# Altium PCB PCB1.PcbDoc
Units mil, origin at the board's own origin, x right, y up, seen from the top; angles counter-clockwise.
Board outline 710 x 845 mil, 2 copper layers (Top Layer, Bottom Layer); 15 components, 12 nets, 64 pads, 18 vias.
Unrouted connection lines stored in the file: 1.
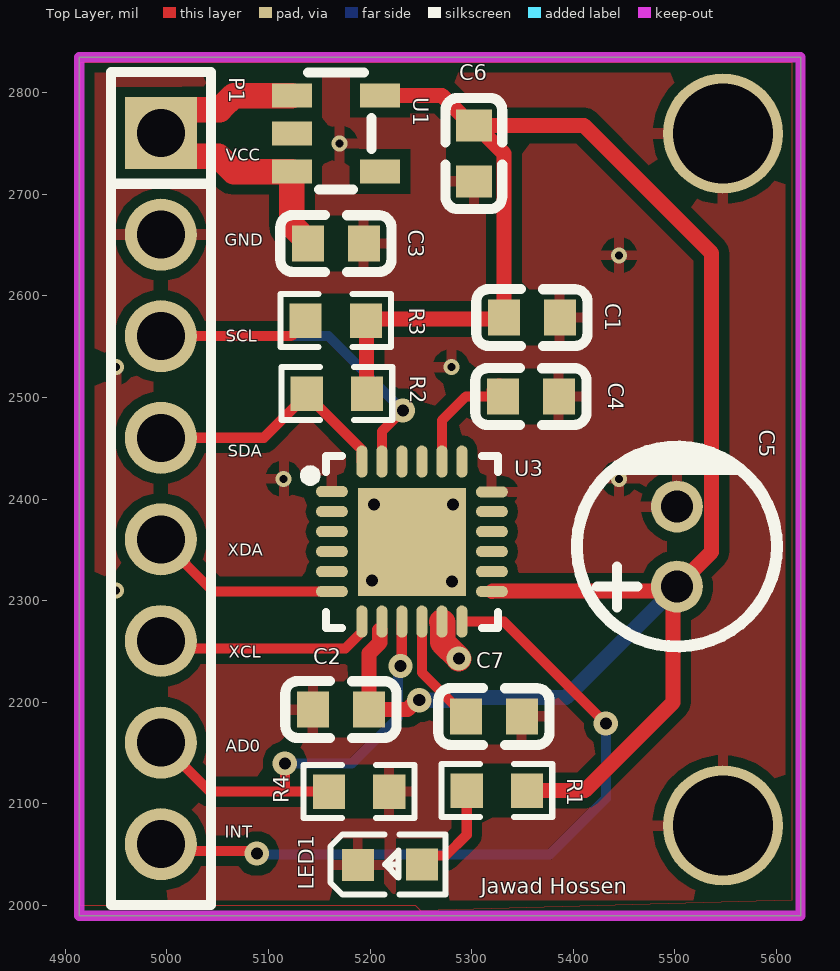
[diagram p0: Top Layer view]
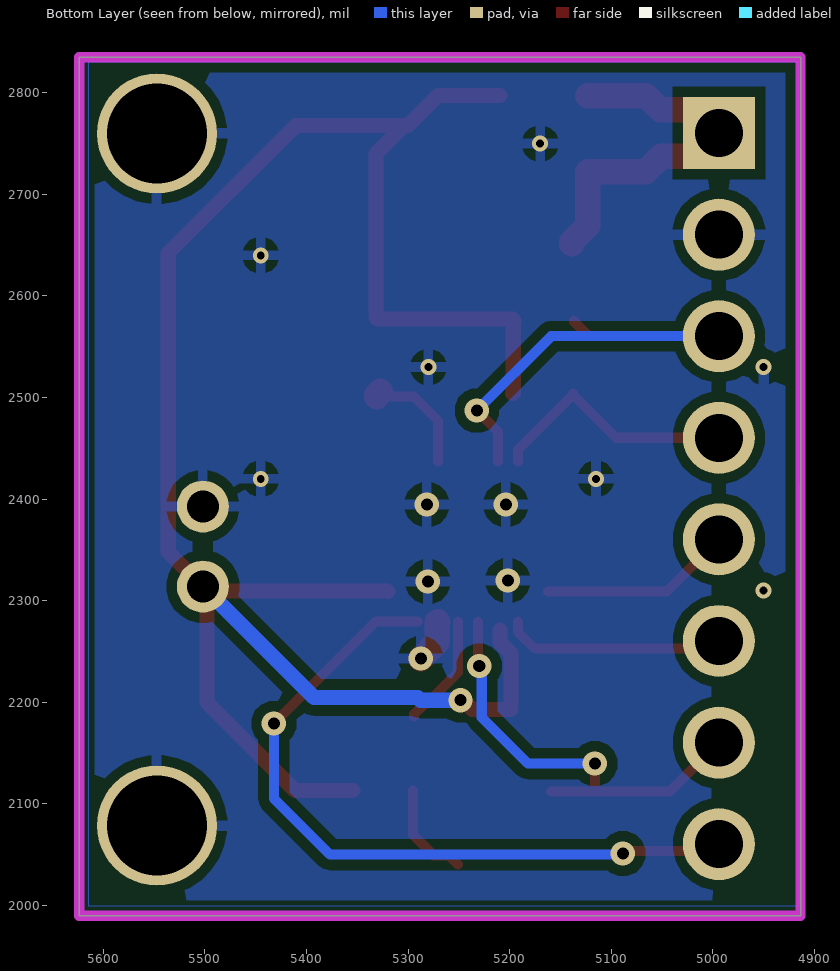
[diagram p1: Bottom Layer view, seen from below]

## Layer stack, top to bottom
Top Solder: solder mask 0.4, Solder Resist, Dk 3.5
Top Layer: signal copper 1.4
Dielectric 1: dielectric 12.6, FR-4, Dk 4.8
Bottom Layer: signal copper 1.4
Bottom Solder: solder mask 0.4, Solder Resist, Dk 3.5

## Board outline
4913.69,1990 4913.69,2835 5623.69,2835 5623.69,1990

## Design rules (kind name [scope] priority, off if disabled: settings)
Clearance [All] p1: gap=10 ignorepadtopadclearanceinfootprint=FALSE except(1: Arc-Arc Arc-Track Arc-SMDPad Arc-THPad Arc-Via Track-Track Track-SMDPad Track-THPad Track-Via SMDPad-SMDPad SMDPad-THPad SMDPad-Via THPad-THPad THPad-Via Via-Via)
PolygonConnect [All] p1: connectstyle=Relief reliefconductorwidth=10 reliefentries=4 polygonreliefangle="90 Angle" airgapwidth=10
RoutingVias [All] p1: holewidth=28 width=50 viastyle="Through Hole" minholewidth=10 minwidth=12 maxholewidth=40 maxwidth=50
SolderMaskExpansion [All] p1: expansion=4 istentingtop=FALSE
SupplyNets "Schematic Supply Nets_2" [InNet('GND')] p1: voltage=0.000
SupplyNets "Schematic Supply Nets_1" [InNet('+MAX6V')] p2: voltage=0.000
SupplyNets "Schematic Supply Nets" [InNet('+3V3')] p3: voltage=0.000
Width [All] p1: maxlimit=40 minlimit=10 preferedwidth=10 minimp=50.000000 maximp=50.000000 favimp=50.000000
30 further rules are at their usual default settings.

## Components (designator, comment, footprint, x,y, rotation, side; value= is the part's Value field where it differs from the comment)
C1 "100nF" C0603 5359.25,2578.74 r180 top
C2 "10uF" C0603 5171.26,2192.91 r0 top
C3 "4.7uF" C0603 5166.34,2651.57 r180 top
C4 "2.2nF" C0603 5358.27,2500.98 r0 top
C5 "100nF" CAP-TH_BD5.0-P2.00-D0.8-FD 5501.97,2353.35 r90 top
C6 "100nF" C0603 5302.17,2740.16 r270 top
C7 "100nF" C0603 5321.85,2186.02 r180 top
LED1 "XL-1608SURC-06" LED0603-RD_RED 5219.51,2040.22 r0 top
P1 "2.54-1*8P母环保" HDR-TH_8P-P2.54-V-F-1 4994.09,2410.43 r270 top
R1 "2kΩ" R0603 5324.8,2113.19 r180 top
R2 "4.7kΩ" R0603 5167.32,2503.94 r0 top
R3 "4.7kΩ" R0603 5166.21,2575.79 r0 top
R4 "4.7kΩ" R0603 5189.11,2112.2 r0 top
U1 "HX9193-33GB-N" SOT-23-5_L2.9-W1.6-P0.95-LS2.8-BL 5166.34,2759.84 r270 top
U3 "MPU-6050" QFN-24_L4.0-W4.0-P0.50-BL-EP2.7 5241.14,2358.27 r270 top

## Footprints (in the part's own frame and the unit in brackets; to place one, negate y for a bottom-side part, rotate by r counter-clockwise, add the part's x,y. Pads: shape width x height; smd on the part's side, far side on the other; paste and mask are expansions set on the pad)
C0603 [mm]
  rect 0.8x0.9 smd: 1(-0.7,0) 2(0.7,0)
  silkscreen extent -1.39,-0.71 1.39,0.71
CAP-TH_BD5.0-P2.00-D0.8-FD [mm]
  round 1.3 hole 0.8: 1(-1,0) 2(1,0)
  silkscreen extent -2.5,-2.5 2.5,2.5
HDR-TH_8P-P2.54-V-F-1 [mm]
  rect 1.8x1.8 hole 1.2: 1(-8.89,0)
  round 1.8 hole 1.2: 2(-6.35,0) 3(-3.81,0) 4(-1.27,0) 5(1.27,0) 6(3.81,0) 7(6.35,0) 8(8.89,0)
  silkscreen extent -10.41,-1.25 10.41,1.25
LED0603-RD_RED [mm]
  rect 0.8x0.8 smd: 1(-0.8,-0.003) 2(0.8,0.003)
  silkscreen extent -1.49,-0.75 1.39,0.76
QFN-24_L4.0-W4.0-P0.50-BL-EP2.7 [mm]
  oval 0.28x0.8 smd paste-100 mask+0.05: 1(-1.25,-2) 2(-0.75,-2) 3(-0.25,-2) 4(0.25,-2) 5(0.75,-2) 6(1.25,-2) 13(1.25,2) 14(0.75,2) 15(0.25,2) 16(-0.25,2) 17(-0.75,2) 18(-1.242,2)
  oval 0.8x0.28 smd paste-100 mask+0.05: 7(2,-1.25) 8(2,-0.75) 9(2,-0.25) 10(2,0.25) 11(2,0.75) 12(2,1.25) 19(-2,1.25) 20(-2,0.75) 21(-2,0.25) 22(-2,-0.25) 23(-2,-0.75) 24(-2,-1.25)
  rect 2.7x2.7 smd paste-100 mask+0.05: 25(0.012,0)
  silkscreen extent -2.14,-2.79 2.16,2.15
R0603 [mil]
  rect 31.75x34.02 smd paste-3937.01 mask+2: 1(-29.66,0) 2(29.66,0)
  silkscreen extent -55,-26 55,26
SOT-23-5_L2.9-W1.6-P0.95-LS2.8-BL [mm]
  rect 0.6x1 smd paste+0 mask+0.05: 1(-0.95,-1.1) 2(0,-1.1) 3(0.95,-1.1) 4(0.95,1.1) 5(-0.95,1.1)
  silkscreen extent -1.52,-0.7 1.4,0.89

## Part data
C1 C6 C7: library part CC0603KRX7R9BB104, JLCPCB Part Class="Basic Part", LCSC Part Name="100nF ±10% 50V", Manufacturer=YAGEO(国巨), Tolerance=±10%, Add into BOM=yes, Convert to PCB=yes, Datasheet=https://atta.szlcsc.com/upload/public/pdf/source/20180910/C282072_33301C7F631E79921B82A8DAC6BCC5B3.pdf, Device=CC0603KRX7R9BB104, Manufacturer Part=CC0603KRX7R9BB104, Supplier=LCSC, Supplier Footprint=0603, Supplier Part=C14663, Symbol=CC0603KRX7R9BB104
C2: library part CL10A106KP8NNNC, JLCPCB Part Class="Basic Part", LCSC Part Name="10uF ±10% 10V", Manufacturer=SAMSUNG(三星), Tolerance=±10%, Add into BOM=yes, Convert to PCB=yes, Datasheet=https://atta.szlcsc.com/upload/public/pdf/source/20160218/1457707763339.pdf, Device=CL10A106KP8NNNC, Manufacturer Part=CL10A106KP8NNNC, Supplier=LCSC, Supplier Footprint=0603, Supplier Part=C19702, Symbol=CL10A106KP8NNNC
C3: library part CL10A475KA8NQNC, JLCPCB Part Class="Extended Part", LCSC Part Name="4.7uF ±10% 25V", Manufacturer=SAMSUNG(三星), Tolerance=±10%, Add into BOM=yes, Convert to PCB=yes, Datasheet=https://atta.szlcsc.com/upload/public/pdf/source/20161108/1478586410580.pdf, Device=CL10A475KA8NQNC, Manufacturer Part=CL10A475KA8NQNC, Supplier=LCSC, Supplier Footprint=0603, Supplier Part=C69335, Symbol=CL10A475KA8NQNC
C4: library part CC0603KRX7R9BB222, JLCPCB Part Class="Extended Part", LCSC Part Name="2.2nF ±10% 50V", Manufacturer=YAGEO(国巨), Tolerance=±10%, Add into BOM=yes, Convert to PCB=yes, Datasheet=https://atta.szlcsc.com/upload/public/pdf/source/20180910/C282072_33301C7F631E79921B82A8DAC6BCC5B3.pdf, Device=CC0603KRX7R9BB222, Manufacturer Part=CC0603KRX7R9BB222, Supplier=LCSC, Supplier Footprint=0603, Supplier Part=C107082, Symbol=CC0603KRX7R9BB222
C5: library part KM104M050D11RR0VH2FP0, JLCPCB Part Class="Extended Part", LCSC Part Name="100nF ±20% 50V", Lifetime @ Temp=1000hrs@105℃, Manufacturer=CX(承兴), Tolerance=±20%, Add into BOM=yes, Convert to PCB=yes, Datasheet=https://atta.szlcsc.com/upload/public/pdf/source/20211027/06D6BA3719C264B639DC286D935D03EA.pdf, Device=KM104M050D11RR0VH2FP0, Manufacturer Part=KM104M050D11RR0VH2FP0, Supplier=LCSC, Supplier Footprint=插件,D5xL11mm, Supplier Part=C28061, Symbol="0.1UF 50V"
LED1: Color Temperature=-, Forward Current=20mA, Illumination Color=Red, JLCPCB Part Class="Extended Part", Lens Color="Colorless Transparent Lens", Manufacturer=XINGLIGHT(成兴光), Operating Temperature=-20℃~+85℃, Power(Watts)=50mW, Voltage - Forward(Vf)=2.3V, Add into BOM=yes, Convert to PCB=yes, Datasheet=https://atta.szlcsc.com/upload/public/pdf/source/20250213/F9766CE804AF391355DCDD48DB3E0DAB.pdf, Device=XL-1608SURC-06, Diode Configuration=-, Lamp Holder Type=-, LCSC Part Name=XL-1608SURC-06, Luminous Intensity=225mcd, Manufacturer Part=XL-1608SURC-06, Mounting Sytle="Positive Stick", Peak Wavelength=625nm, Supplier=LCSC, Supplier Footprint=0603, Supplier Part=C965799, Symbol=XL-1608SURC-06, Viewing Angle=120°, Wavelength - Dominant=620nm~630nm
P1: JLCPCB Part Class="Extended Part", LCSC Part Name="间距:2.54mm 1x8P 直插", Manufacturer=BOOMELE(博穆精密), Add into BOM=yes, Contact Material=-, Contact Plating=-, Convert to PCB=yes, Datasheet=https://atta.szlcsc.com/upload/public/pdf/source/20231221/1CA800C6799ED97958773716FAA1BFFE.pdf, Device=2.54-1*8P母环保, Holes Structure=1x8P, Insulation Height=-, Manufacturer Part=2.54-1*8P母环保, Mounting Type=Straight, Number of Holes=8P, Number of Rows=Plugin, Pitch=2.54mm, Row Spacing=-, Supplier=LCSC, Supplier Footprint=插件,P=2.54mm, Supplier Part=C27438, Symbol=Header-Female-2.54_1x8
R1: library part RC0603FR-072KL, JLCPCB Part Class="Extended Part", LCSC Part Name="厚膜电阻 2kΩ ±1% 100mW", Manufacturer=YAGEO(国巨), Operating Temperature=-55℃~+155℃, Power(Watts)=100mW, Temperature Coefficient=±100ppm/℃, Tolerance=±1%, Voltage-Supply(Max)=75V, Add into BOM=yes, Convert to PCB=yes, Datasheet=https://atta.szlcsc.com/upload/public/pdf/source/20180316/70C0E2BDAE7FCC62C531A5A58D202EE1.pdf, Device=RC0603FR-072KL, Manufacturer Part=RC0603FR-072KL, Supplier=LCSC, Supplier Footprint=0603, Supplier Part=C105576, Symbol=RC0603FR-072KL, Type="Thick Film Resistors"
R2 R3 R4: library part RC0603FR-074K7L, JLCPCB Part Class="Extended Part", LCSC Part Name="厚膜电阻 4.7kΩ ±1% 100mW", Manufacturer=YAGEO(国巨), Operating Temperature Range=-55℃~+155℃, Temperature Coefficient=±100ppm/℃, Tolerance=±1%, Add into BOM=yes, Convert to PCB=yes, Datasheet=https://atta.szlcsc.com/upload/public/pdf/source/20180224/C181757_15194369480721363983.pdf, Device=RC0603FR-074K7L, Manufacturer Part=RC0603FR-074K7L, Supplier=LCSC, Supplier Footprint=0603, Supplier Part=C99782, Symbol=RC0603FR-074K7L, Type="Thick Film Resistors"
U1: JLCPCB Part Class="Extended Part", Manufacturer=HX(恒佳兴), Contributor=lcsc, Manufacturer Part=HX9193-33GB-N, spicePre=U, spiceSymbolName=HX9193-33GB-N, Supplier=LCSC, Supplier Part=C2995655
U3: JLCPCB Part Class="Extended Part", Manufacturer="TDK InvenSense(应美盛)", Operating Temperature=-40℃~+85℃, Add into BOM=yes, Convert to PCB=yes, Datasheet=https://atta.szlcsc.com/upload/public/pdf/source/20140425/1457707046159.pdf, Device=MPU-6050, LCSC Part Name=MPU-6050, Manufacturer Part=MPU-6050, Sensor Type=加速度计陀螺仪, Supplier=LCSC, Supplier Footprint=QFN-24-EP(4x4), Supplier Part=C24112, Symbol=MPU-6050_C24112

## Free pads (board coordinates)
  round 118.11 hole 98.43: 2(5547.24,2759.84) 3(5547.24,2078.74)

## Via types
v1: diameter 24, hole 12, Top Layer to Bottom Layer, 8 vias
v2: diameter 15.74, hole 7.87, Top Layer to Bottom Layer, 7 vias
v3: diameter 24, hole 12, Top Layer to Bottom Layer, tented top, 3 vias

## Nets (pads, with @x,y where several pads share a name; then routed paths per layer and width w, separated by ;. In a path a pad name is that pad's centre, name@x,y a point inside that pad or via, vN(x,y) a via of type N, cw(c..) or ccw(c..) an arc to the next point about the centre after c; other vN are vias at no path point)
+3V3: C1.2 C2.2 C5.1 C6.1 R1.1 R2.2 R3.2 U1.5 U3.8 U3.13 | length 2045.1
  Top Layer w15: R2.2 5196.42,2504.5 5196.42,2575.23 R3.2 5197.34,2577.26 5330.22,2577.26 C1.2 5331.69,2740.16 5304.13,2767.72 5410.43,2767.72 5536.06,2642.09 5536.06,2348.07 C5.1 ; U3.8@5209.62,2271.28 5209.62,2259.04 5198.82,2248.23 C2.2 5236.74,2192.91 5246,2202.18 v1(5248.44,2202.18) ; U1.5 5270.67,2797.24 5300.2,2767.72 C6.1 ; U3.13 5320.55,2309.73 5497.72,2309.73 5498.03,2310.04 5498.03,2199.8 5411.42,2113.19 R1.1
  Bottom Layer w15: v1(5248.44,2202.18) 5287.89,2202.18 5290.44,2204.72 5392.72,2204.72 C5.1
+MAX6V: C3.2 P1.1 U1.1 U1.3 | length 366.2
  Top Layer w25: U1.1 5065.84,2797.24 5051.97,2783.37 5017.03,2783.37 P1.1 5017.03,2737.5 5050.78,2737.5 5065.84,2722.44 U1.3 5123.03,2669.3 5138.78,2653.54 C3.2
AD0: P1.7 R4.1 U3.9 | length 440.2
  Top Layer w10: P1.7 5042.32,2112.2 5113.19,2112.2 ; v1(5116.14,2139.76) 5116.14,2115.16 5113.19,2112.2 ; R4.1 5113.19,2112.2 ; v1(5229.98,2235.8) 5231.1,2236.92 5231.1,2279.33 U3.9
  Bottom Layer w10: v1(5116.14,2139.76) 5182.09,2139.76 5227.44,2185.12 5227.44,2233.25 v1(5229.98,2235.8)
GND: C1.1 C2.1 C3.1 C4.2 C5.2 C6.2 C7.1 LED1.1 P1.2 pad.2 pad.3 R4.2 U1.2 U3.1 U3.11 U3.18 U3.25 | length 43.3
  Top Layer w25: U3.11 5271.34,2278.86 5271.34,2259.17 v1(5287.4,2243.11)
  other v1: 5280.51,2318.9
  other v2: 4950,2310 5115,2420 5445,2420 4950,2530 5280,2530 5445,2640 5170,2750
  other v3: 5201.77,2319.88 5203.74,2394.68 5281.5,2394.68
INT: P1.8 U3.12 | length 722.2
  Top Layer w10: P1.8 5000.67,2053.86 5085.9,2053.86 v1(5088.58,2051.18) ; U3.12 5331.69,2279.53 v1(5432.09,2179.13)
  Bottom Layer w10: v1(5088.58,2051.18) 5089.57,2050.2 5376.97,2050.2 5432.09,2105.32 v1(5432.09,2179.13)
NetC4_1: C4.1 U3.20 | length 117.1
  Top Layer w10: U3.20 5270.67,2477.36 5294.29,2500.98 C4.1
  Top Layer w25: C4.1@5327.21,2506.45 5330.71,2502.95 C4.1
NetC7_2: C7.2 U3.10 | length 112.6
  Top Layer w10: U3.10 5250.98,2229.34 5281.57,2198.74 5283.54,2198.74 5294.29,2187.99 C7.2
NetLED1_2: LED1.2 R1.2 | length 99.8
  Top Layer w10: LED1.2 5259.96,2049.33 5274.72,2049.33 5295.14,2069.75 R1.2
SCL: P1.3 R3.1 U3.23 | length 476.8
  Top Layer w10: P1.3 5122.32,2560.43 5136.55,2574.65 R3.1 ; U3.23 5211.61,2466.53 v1(5232.28,2487.2)
  Bottom Layer w10: P1.3 5159.06,2560.43 v1(5232.28,2487.2)
SDA: P1.4 R2.1 U3.24 | length 250.5
  Top Layer w10: P1.4 5095.29,2460.43 R2.1@5137.66,2502.8 ; R2.1 R2.1@5137.66,2502.8 ; U3.24 5191.73,2437.2 5191.73,2448.73 R2.1@5137.66,2502.8
XCL: P1.6 U3.7 | length 217.9
  Top Layer w10: P1.6 5001.57,2252.95 5175.59,2252.95 5191.93,2269.29 U3.7
XDA: P1.5 U3.6 | length 189.6
  Top Layer w10: P1.5 5045.47,2309.06 U3.6
pads on no net: U1.4 U3.2 U3.3 U3.4 U3.5 U3.14 U3.15 U3.16 U3.17 U3.19 U3.21 U3.22

## Polygon pours and split planes (outlines as drawn)
GND on Bottom Layer "GND_L02_P003" (solid, remove dead copper, pour order 3): 4916.1,2830 5615,2830 5615,2000 4915,2000
GND on Bottom Layer "NONET_L02_P001" (solid, remove dead copper, shelved, pour order 1): 4915.44,2829.34 4916.1,2830 5615,2830 5615,2000 4915,2000
GND on Top Layer "GND_L01_P002" (solid, remove dead copper, pour order 2): 4915,2830 5615,2830 5615,2005 5610,2000 4915,2000
GND on Top Layer "NONET_L01_P000" (solid, remove dead copper, shelved, pour order 0): 4915,2830 5615,2830 5615,2410 5615,2375 5615,2220 5615,2115 5615,2005 5250,1995 5245,2000 4915,2000

## Keep-outs
Keep-Out Layer:
  the board outline again, w10

## Silkscreen, mask and mechanical layers (free items; w line width, h text height)
Top Overlay:
  text "VCC" at 5058.07,2733.27 h12
  text "GND" at 5057.09,2649.61 h12
  text "SCL" at 5058.07,2555.12 h12
  text "SDA" at 5060.04,2441.93 h12
  text "XDA" at 5060.04,2344.49 h12
  text "XCL" at 5061.02,2244.09 h12
  text "AD0" at 5058.07,2151.57 h12
  text "INT" at 5057.09,2066.93 h12
  text "Jawad Hossen" at 5309.06,2011.81 h15